# EAGLE board BBB_Breakout_Cape-Panel-v10 (EAGLE 7.7.0), part 1 of 3
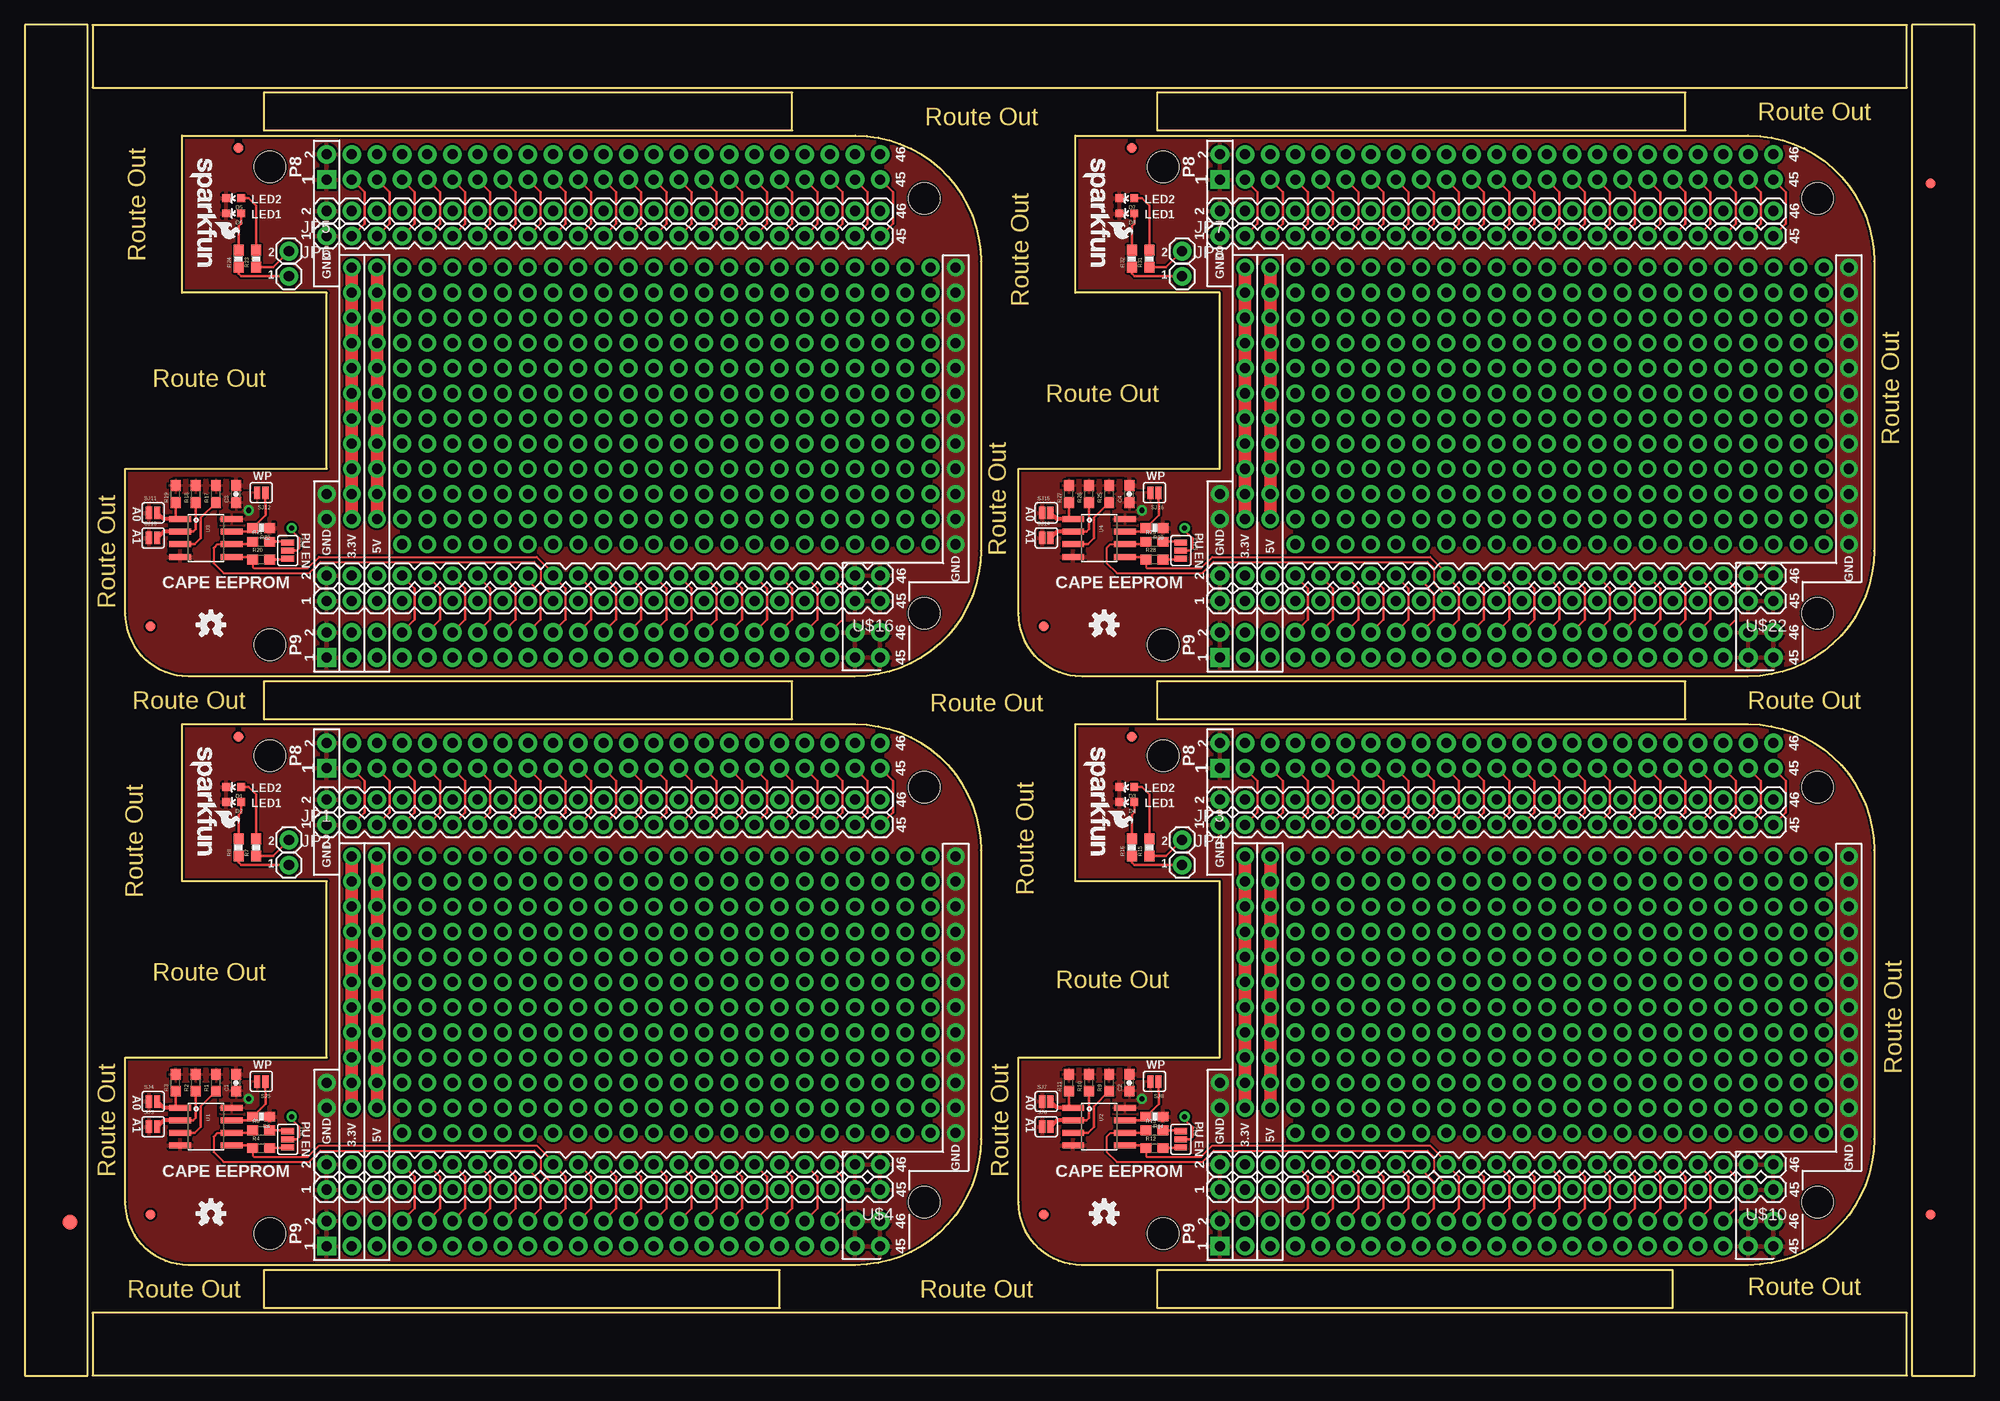
[diagram p0: board, top side]
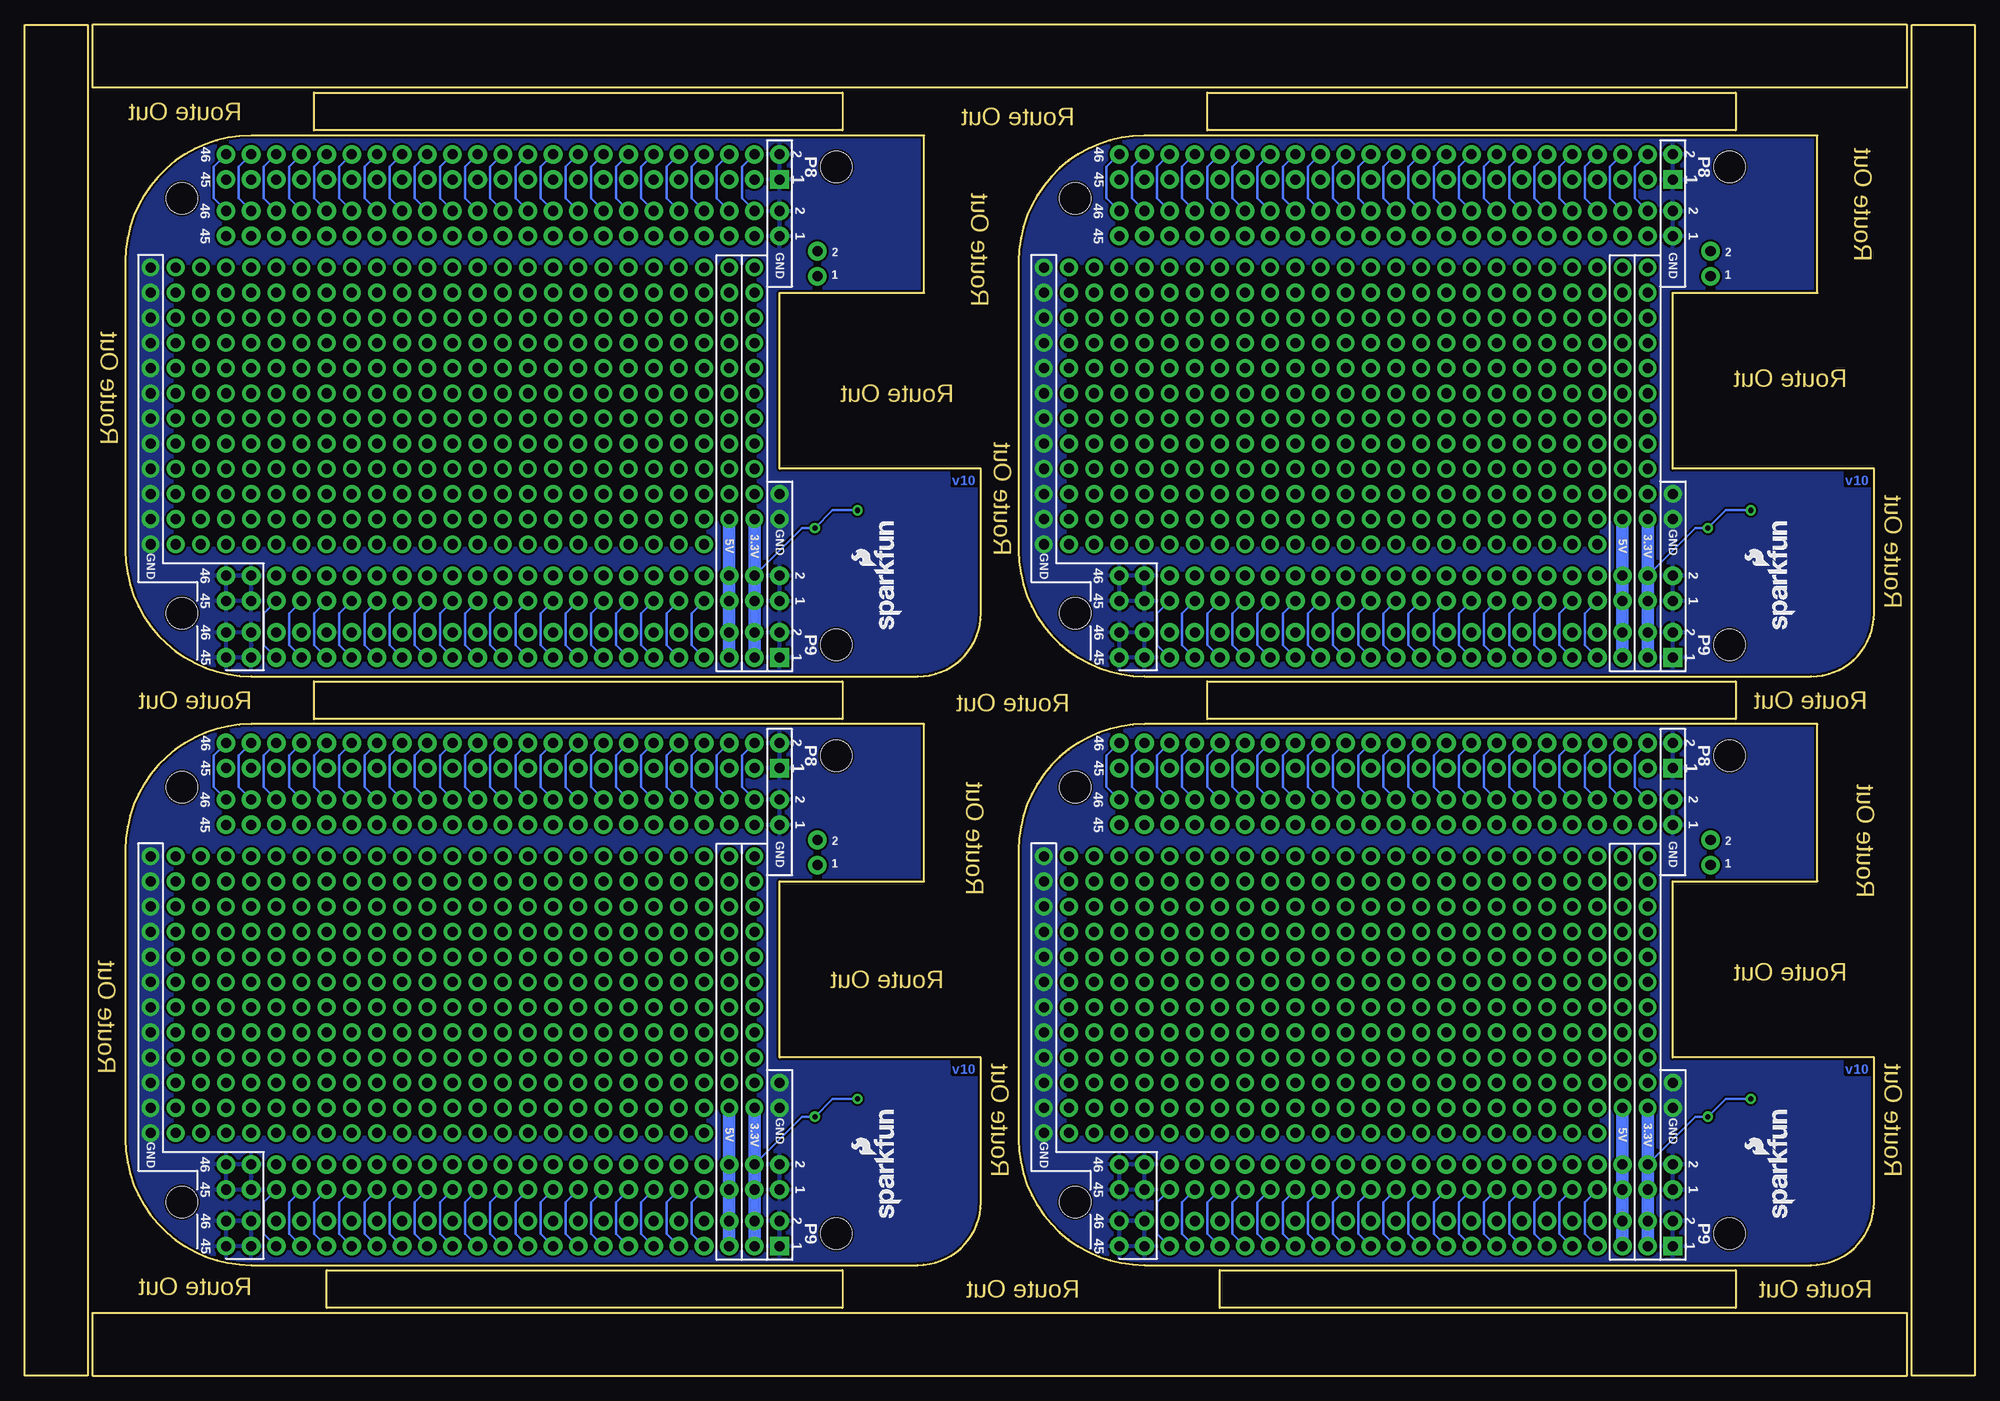
[diagram p1: board, bottom side, seen from below]

Size 196.85 x 136.4 mm. Coordinates in mm from the lower left corner, seen from the top.
Outline: 10.16,32.13 30.48,32.13 30.48,49.91 15.88,49.91 15.88,65.79 83.82,65.79 arc-90 96.52,53.09 96.52,23.88 arc-90 83.82,11.18 16.51,11.18 arc-90 10.16,17.53 10.16,32.13
Outline: 77.47,70.1 24.13,70.1 24.13,66.29 77.47,66.29 77.47,70.1
Outline: 76.2,10.67 24.13,10.67 24.13,6.86 76.2,6.86 76.2,10.67
Outline: 6.35,0 6.35,136.4 0,136.4 0,0 6.35,0
Outline: 6.86,6.35 6.86,0 189.99,0 189.99,6.35 6.86,6.35
Outline: 100.33,32.13 120.65,32.13 120.65,49.91 106.05,49.91 106.05,65.79 173.99,65.79 arc-90 186.69,53.09 186.69,23.88 arc-90 173.99,11.18 106.68,11.18 arc-90 100.33,17.53 100.33,32.13
Outline: 167.64,70.1 114.3,70.1 114.3,66.29 167.64,66.29 167.64,70.1
Outline: 10.16,91.57 30.48,91.57 30.48,109.35 15.88,109.35 15.88,125.22 83.82,125.22 arc-90 96.52,112.52 96.52,83.31 arc-90 83.82,70.61 16.51,70.61 arc-90 10.16,76.96 10.16,91.57
Outline: 77.47,129.54 24.13,129.54 24.13,125.73 77.47,125.73 77.47,129.54
Outline: 100.33,91.57 120.65,91.57 120.65,109.35 106.05,109.35 106.05,125.22 173.99,125.22 arc-90 186.69,112.52 186.69,83.31 arc-90 173.99,70.61 106.68,70.61 arc-90 100.33,76.96 100.33,91.57
Outline: 167.64,129.54 114.3,129.54 114.3,125.73 167.64,125.73 167.64,129.54
Outline: 196.85,0 196.85,136.4 190.5,136.4 190.5,0 196.85,0
Outline: 166.37,10.67 114.3,10.67 114.3,6.86 166.37,6.86 166.37,10.67
Outline: 189.99,130.05 189.99,136.4 6.86,136.4 6.86,130.05 189.99,130.05
Copper layers (1*16): Top 0.035mm / dielectric 1.5mm / Bottom 0.035mm
Design rules "SparkFun-2-layer": minimum track width 7mil, minimum drill 15mil, track to track 8mil, track to pad 8mil, pad to pad 8mil, via to via 8mil, smd to smd 8mil, copper to edge 8mil, drill to drill 8mil, minimum pad ring 12mil, minimum via ring 10mil, stop-mask expansion 4mil, vias tented up to drill 20mil, thermal gap 10mil

## Footprints (pad centres in the part's own frame; a part is rotated, then mirrored left to right if it is on the bottom)
0603-CAP = smd 1.1 x 1: 1 -0.85,0; 2 0.85,0
LED-0603 = smd 0.8 x 0.8: A 0,-0.75; C 0,0.75
FIDUCIAL-1.5X3 = smd 1.5 x 1.5: 1 0,0
FIDUCIAL-1X2 = smd 1 x 1: 1 0,0
1X01 = drill 1.016 pad 1.88: 1 0,0
0603 = smd 1.1 x 1: 1 -0.85,0; 2 0.85,0
0603-RES = smd 1.1 x 1: 1 -0.85,0; 2 0.85,0
SMT-JUMPER_3_2-NC_PASTE_SILK = smd 0.635 x 1.27: 1 -0.813,0; 2 0,0; 3 0.813,0
SMT-JUMPER_2_NO_SILK = smd 0.635 x 1.27: 1 -0.406,0; 2 0.406,0
SO08 = smd 0.61 x 2.21: 1 -1.905,-2.616; 2 -0.635,-2.616; 3 0.635,-2.616; 4 1.905,-2.616; 5 1.905,2.616; 6 0.635,2.616; 7 -0.635,2.616; 8 -1.905,2.616
BEAGLE_BONE_BLACK_CAPE = drill 1.016 pad 1.88 square: P8.1 20.32,50.165; P9.1 20.32,1.905 | drill 1.016 pad 1.88: P8.2 20.32,52.705; P8.3 22.86,50.165; P8.4 22.86,52.705; P8.5 25.4,50.165; P8.6 25.4,52.705; P8.7 27.94,50.165; P8.8 27.94,52.705; P8.9 30.48,50.165; P8.10 30.48,52.705; P8.11 33.02,50.165; P8.12 33.02,52.705; P8.13 35.56,50.165; P8.14 35.56,52.705; P8.15 38.1,50.165; P8.16 38.1,52.705; P8.17 40.64,50.165; P8.18 40.64,52.705; P8.19 43.18,50.165; P8.20 43.18,52.705; P8.21 45.72,50.165; P8.22 45.72,52.705; P8.23 48.26,50.165; P8.24 48.26,52.705; P8.25 50.8,50.165; P8.26 50.8,52.705; P8.27 53.34,50.165; P8.28 53.34,52.705; P8.29 55.88,50.165; P8.30 55.88,52.705; P8.31 58.42,50.165; P8.32 58.42,52.705; P8.33 60.96,50.165; P8.34 60.96,52.705; P8.35 63.5,50.165; P8.36 63.5,52.705; P8.37 66.04,50.165; P8.38 66.04,52.705; P8.39 68.58,50.165; P8.40 68.58,52.705; P8.41 71.12,50.165; P8.42 71.12,52.705; P8.43 73.66,50.165; P8.44 73.66,52.705; P8.45 76.2,50.165; P8.46 76.2,52.705; P9.2 20.32,4.445; P9.3 22.86,1.905; P9.4 22.86,4.445; P9.5 25.4,1.905; P9.6 25.4,4.445; P9.7 27.94,1.905; P9.8 27.94,4.445; P9.9 30.48,1.905; P9.10 30.48,4.445; P9.11 33.02,1.905; P9.12 33.02,4.445; P9.13 35.56,1.905; P9.14 35.56,4.445; P9.15 38.1,1.905; P9.16 38.1,4.445; P9.17 40.64,1.905; P9.18 40.64,4.445; P9.19 43.18,1.905; P9.20 43.18,4.445; P9.21 45.72,1.905; P9.22 45.72,4.445; P9.23 48.26,1.905; P9.24 48.26,4.445; P9.25 50.8,1.905; P9.26 50.8,4.445; P9.27 53.34,1.905; P9.28 53.34,4.445; P9.29 55.88,1.905; P9.30 55.88,4.445; P9.31 58.42,1.905; P9.32 58.42,4.445; P9.33 60.96,1.905; P9.34 60.96,4.445; P9.35 63.5,1.905; P9.36 63.5,4.445; P9.37 66.04,1.905; P9.38 66.04,4.445; P9.39 68.58,1.905; P9.40 68.58,4.445; P9.41 71.12,1.905; P9.42 71.12,4.445; P9.43 73.66,1.905; P9.44 73.66,4.445; P9.45 76.2,1.905; P9.46 76.2,4.445 | hole 3.175: 14.605,3.175; 80.645,6.35; 80.645,48.26; 14.605,51.435
1X23 = drill 1.016 pad 1.88: 2 -26.67,0; 3 -24.13,0; 4 -21.59,0; 5 -19.05,0; 6 -16.51,0; 7 -13.97,0; 8 -11.43,0; 9 -8.89,0; 10 -6.35,0; 11 -3.81,0; 12 -1.27,0; 13 1.27,0; 14 3.81,0; 15 6.35,0; 16 8.89,0; 17 11.43,0; 18 13.97,0; 19 16.51,0; 20 19.05,0; 21 21.59,0; 22 24.13,0; 23 26.67,0; 24 29.21,0

## Placement (x,y rotation side)
C1  0.1uF  [0603-CAP]  21.34,29.59 90 top
C2  0.1uF  [0603-CAP]  111.51,29.59 90 top
C3  0.1uF  [0603-CAP]  21.34,89.03 90 top
C4  0.1uF  [0603-CAP]  111.51,89.03 90 top
D1  RED  [LED-0603]  21.08,59.44 90 top
D2  RED  [LED-0603]  21.08,57.91 90 top
D3  RED  [LED-0603]  111.25,59.44 90 top
D4  RED  [LED-0603]  111.25,57.91 90 top
D5  RED  [LED-0603]  21.08,118.87 90 top
D6  RED  [LED-0603]  21.08,117.35 90 top
D7  RED  [LED-0603]  111.25,118.87 90 top
D8  RED  [LED-0603]  111.25,117.35 90 top
E$1  [FIDUCIAL-1.5X3]  4.57,15.49 0 top
E$3  [FIDUCIAL-1X2]  192.41,16.26 0 top
E$4  [FIDUCIAL-1X2]  192.41,120.4 180 top
FID1  FIDUCIAL1X2  [FIDUCIAL-1X2]  12.7,16.26 0 top
FID2  FIDUCIAL1X2  [FIDUCIAL-1X2]  21.59,64.52 0 top
FID3  FIDUCIAL1X2  [FIDUCIAL-1X2]  102.87,16.26 0 top
FID4  FIDUCIAL1X2  [FIDUCIAL-1X2]  111.76,64.52 0 top
FID5  FIDUCIAL1X2  [FIDUCIAL-1X2]  12.7,75.69 0 top
FID6  FIDUCIAL1X2  [FIDUCIAL-1X2]  21.59,123.95 0 top
FID7  FIDUCIAL1X2  [FIDUCIAL-1X2]  102.87,75.69 0 top
FID8  FIDUCIAL1X2  [FIDUCIAL-1X2]  111.76,123.95 0 top
JP1  M01PTH  [1X01]  26.67,54.1 0 top
JP2  M01PTH  [1X01]  26.67,51.56 0 top
JP3  M01PTH  [1X01]  116.84,54.1 0 top
JP4  M01PTH  [1X01]  116.84,51.56 0 top
JP5  M01PTH  [1X01]  26.67,113.54 0 top
JP6  M01PTH  [1X01]  26.67,111 0 top
JP7  M01PTH  [1X01]  116.84,113.54 0 top
JP8  M01PTH  [1X01]  116.84,111 0 top
LOGO1  SFE_LOGO_NAME_FLAME.1_INCH  [SFE_LOGO_NAME_FLAME_.1]  106.68,63.88 270 top
LOGO2  OSHW-LOGOS  [OSHW-LOGO-S]  18.8,16.38 0 top
LOGO3  SFE_LOGO_NAME_FLAME.1_INCH  [SFE_LOGO_NAME_FLAME_.1]  16.51,63.88 270 top
LOGO4  OSHW-LOGOS  [OSHW-LOGO-S]  108.97,16.38 0 top
LOGO5  SFE_LOGO_NAME_FLAME.1_INCH  [SFE_LOGO_NAME_FLAME_.1]  16.51,123.32 270 top
LOGO6  OSHW-LOGOS  [OSHW-LOGO-S]  18.8,75.82 0 top
LOGO7  SFE_LOGO_NAME_FLAME.1_INCH  [SFE_LOGO_NAME_FLAME_.1]  106.68,123.32 270 top
LOGO8  OSHW-LOGOS  [OSHW-LOGO-S]  108.97,75.82 0 top
R1  4.7k  [0603]  19.3,29.59 90 top
R2  4.7k  [0603]  17.27,29.59 90 top
R3  4.7k  [0603]  15.24,29.59 90 top
R4  4.7k  [0603]  23.88,22.99 0 top
R5  4.7k  [0603]  23.88,24.77 0 top
R6  10k  [0603-RES]  23.88,26.16 180 top
R7  1K  [0603-RES]  23.37,53.34 90 top
R8  1K  [0603-RES]  21.59,53.34 90 top
R9  4.7k  [0603]  109.47,29.59 90 top
R10  4.7k  [0603]  107.44,29.59 90 top
R11  4.7k  [0603]  105.41,29.59 90 top
R12  4.7k  [0603]  114.05,22.99 0 top
R13  4.7k  [0603]  114.05,24.77 0 top
R14  10k  [0603-RES]  114.05,26.16 180 top
R15  1K  [0603-RES]  113.54,53.34 90 top
R16  1K  [0603-RES]  111.76,53.34 90 top
R17  4.7k  [0603]  19.3,89.03 90 top
R18  4.7k  [0603]  17.27,89.03 90 top
R19  4.7k  [0603]  15.24,89.03 90 top
R20  4.7k  [0603]  23.88,82.42 0 top
R21  4.7k  [0603]  23.88,84.2 0 top
R22  10k  [0603-RES]  23.88,85.6 180 top
R23  1K  [0603-RES]  23.37,112.78 90 top
R24  1K  [0603-RES]  21.59,112.78 90 top
R25  4.7k  [0603]  109.47,89.03 90 top
R26  4.7k  [0603]  107.44,89.03 90 top
R27  4.7k  [0603]  105.41,89.03 90 top
R28  4.7k  [0603]  114.05,82.42 0 top
R29  4.7k  [0603]  114.05,84.2 0 top
R30  10k  [0603-RES]  114.05,85.6 180 top
R31  1K  [0603-RES]  113.54,112.78 90 top
R32  1K  [0603-RES]  111.76,112.78 90 top
SJ1  I2C EN  [SMT-JUMPER_3_2-NC_PASTE_SILK]  26.54,23.88 270 top
SJ2  I2C EN  [SMT-JUMPER_3_2-NC_PASTE_SILK]  116.71,23.88 270 top
SJ3  A1  [SMT-JUMPER_2_NO_SILK]  12.95,25.15 0 top
SJ4  A0  [SMT-JUMPER_2_NO_SILK]  12.95,27.69 0 top
SJ5  WP  [SMT-JUMPER_2_NO_SILK]  23.88,29.72 180 top
SJ6  A1  [SMT-JUMPER_2_NO_SILK]  103.12,25.15 0 top
SJ7  A0  [SMT-JUMPER_2_NO_SILK]  103.12,27.69 0 top
SJ8  WP  [SMT-JUMPER_2_NO_SILK]  114.05,29.72 180 top
SJ9  I2C EN  [SMT-JUMPER_3_2-NC_PASTE_SILK]  26.54,83.31 270 top
SJ10  A1  [SMT-JUMPER_2_NO_SILK]  12.95,84.58 0 top
SJ11  A0  [SMT-JUMPER_2_NO_SILK]  12.95,87.12 0 top
SJ12  WP  [SMT-JUMPER_2_NO_SILK]  23.88,89.15 180 top
SJ13  I2C EN  [SMT-JUMPER_3_2-NC_PASTE_SILK]  116.71,83.31 270 top
SJ14  A1  [SMT-JUMPER_2_NO_SILK]  103.12,84.58 0 top
SJ15  A0  [SMT-JUMPER_2_NO_SILK]  103.12,87.12 0 top
SJ16  WP  [SMT-JUMPER_2_NO_SILK]  114.05,89.15 180 top
U1  EEPROM-I2CSMD  [SO08]  18.29,25.15 270 top
U2  EEPROM-I2CSMD  [SO08]  108.46,25.15 270 top
U3  EEPROM-I2CSMD  [SO08]  18.29,84.58 270 top
U4  EEPROM-I2CSMD  [SO08]  108.46,84.58 270 top
U$1  BEAGLE_BONE_BLACK_CAPE  [BEAGLE_BONE_BLACK_CAPE]  10.16,11.18 0 top
U$2  M23  [1X23]  59.69,55.63 180 top
U$3  M23  [1X23]  59.69,58.17 180 top
U$4  M23  [1X23]  59.69,18.8 180 top
U$5  M23  [1X23]  59.69,21.34 180 top
U$6  [SFE_LOGO_NAME_FLAME_.1]  18.03,15.49 90 bottom
U$7  BEAGLE_BONE_BLACK_CAPE  [BEAGLE_BONE_BLACK_CAPE]  100.33,11.18 0 top
U$8  M23  [1X23]  149.86,55.63 180 top
U$9  M23  [1X23]  149.86,58.17 180 top
U$10  M23  [1X23]  149.86,18.8 180 top
U$11  M23  [1X23]  149.86,21.34 180 top
U$12  [SFE_LOGO_NAME_FLAME_.1]  108.2,15.49 90 bottom
U$13  BEAGLE_BONE_BLACK_CAPE  [BEAGLE_BONE_BLACK_CAPE]  10.16,70.61 0 top
U$14  M23  [1X23]  59.69,115.06 180 top
U$15  M23  [1X23]  59.69,117.6 180 top
U$16  M23  [1X23]  59.69,78.23 180 top
U$17  M23  [1X23]  59.69,80.77 180 top
U$18  [SFE_LOGO_NAME_FLAME_.1]  18.03,74.93 90 bottom
U$19  BEAGLE_BONE_BLACK_CAPE  [BEAGLE_BONE_BLACK_CAPE]  100.33,70.61 0 top
U$20  M23  [1X23]  149.86,115.06 180 top
U$21  M23  [1X23]  149.86,117.6 180 top
U$22  M23  [1X23]  149.86,78.23 180 top
U$23  M23  [1X23]  149.86,80.77 180 top
U$24  [SFE_LOGO_NAME_FLAME_.1]  108.2,74.93 90 bottom

## Library data of the parts
C1-C4 = SparkFun-Capacitors; PROD_ID: CAP-00810
D1-D8 = SparkFun-LED; PROD_ID: DIO-00819
E$1 = SparkFun-Retired
E$3 E$4 FID1-FID8 LOGO1-LOGO8 U$6 U$12 U$18 U$24 = SparkFun-Aesthetics
JP1-JP8 U$2-U$5 U$8-U$11 U$14-U$17 U$20-U$23 = SparkFun-Connectors
R1-R5 R9-R13 R17-R21 R25-R29 = SparkFun-Resistors; PROD_ID: RES-07857
R6 R14 R22 R30 = SparkFun-Resistors; PROD_ID: RES-00824
R7 R8 R15 R16 R23 R24 R31 R32 = SparkFun-Resistors; PROD_ID: RES-07856
SJ1-SJ16 = SparkFun-Jumpers
U1-U4 = SparkFun-DigitalIC
U$1 U$7 U$13 U$19 = SparkFun-Boards

## Nets
3.3V: C1.1 R1.2 R2.2 R3.2 SJ1.2 SJ5.2 U1.8 U$1.P9.3 U$1.P9.4 U$4.23 U$5.23
3.3V1: C2.1 R9.2 R10.2 R11.2 SJ2.2 SJ8.2 U2.8 U$7.P9.3 U$7.P9.4 U$10.23 U$11.23
3.3V2: C3.1 R17.2 R18.2 R19.2 SJ9.2 SJ12.2 U3.8 U$13.P9.3 U$13.P9.4 U$16.23 U$17.23
3.3V3: C4.1 R25.2 R26.2 R27.2 SJ13.2 SJ16.2 U4.8 U$19.P9.3 U$19.P9.4 U$22.23 U$23.23
5V: U$1.P9.5 U$1.P9.6 U$4.22 U$5.22
5V1: U$7.P9.5 U$7.P9.6 U$10.22 U$11.22
5V2: U$13.P9.5 U$13.P9.6 U$16.22 U$17.22
5V3: U$19.P9.5 U$19.P9.6 U$22.22 U$23.22
A0: R3.1 SJ4.2 U1.1
A1: R2.1 SJ3.2 U1.2
A2: R10.1 SJ6.2 U2.2
A3: R11.1 SJ7.2 U2.1
A4: R18.1 SJ10.2 U3.2
A5: R19.1 SJ11.2 U3.1
A6: R26.1 SJ14.2 U4.2
A7: R27.1 SJ15.2 U4.1
GND: C1.2 D1.C D2.C R6.1 SJ3.1 SJ4.1 U1.4 U$1.P8.1 U$1.P8.2 U$1.P9.1 U$1.P9.2 U$1.P9.43 U$1.P9.44 U$1.P9.45 U$1.P9.46 U$2.24 U$3.24 U$4.2 U$4.3 U$4.24 U$5.2 U$5.3 U$5.24
GND1: C2.2 D3.C D4.C R14.1 SJ6.1 SJ7.1 U2.4 U$7.P8.1 U$7.P8.2 U$7.P9.1 U$7.P9.2 U$7.P9.43 U$7.P9.44 U$7.P9.45 U$7.P9.46 U$8.24 U$9.24 U$10.2 U$10.3 U$10.24 U$11.2 U$11.3 U$11.24
GND2: C3.2 D5.C D6.C R22.1 SJ10.1 SJ11.1 U3.4 U$13.P8.1 U$13.P8.2 U$13.P9.1 U$13.P9.2 U$13.P9.43 U$13.P9.44 U$13.P9.45 U$13.P9.46 U$14.24 U$15.24 U$16.2 U$16.3 U$16.24 U$17.2 U$17.3 U$17.24
GND3: C4.2 D7.C D8.C R30.1 SJ14.1 SJ15.1 U4.4 U$19.P8.1 U$19.P8.2 U$19.P9.1 U$19.P9.2 U$19.P9.43 U$19.P9.44 U$19.P9.45 U$19.P9.46 U$20.24 U$21.24 U$22.2 U$22.3 U$22.24 U$23.2 U$23.3 U$23.24
N$1: R6.2 SJ5.1 U1.7
N$2: U$1.P8.45 U$2.2
N$3: D1.A R7.2
N$4: U$1.P8.43 U$2.3
N$5: U$1.P8.41 U$2.4
N$6: R1.1 U1.3
N$7: D2.A R8.2
N$8: JP1.1 R7.1
N$9: U$1.P8.39 U$2.5
N$10: R4.2 SJ1.3
N$11: R5.2 SJ1.1
N$12: U$1.P8.37 U$2.6
N$13: U$1.P8.35 U$2.7
N$14: U$1.P8.33 U$2.8
N$15: U$1.P8.31 U$2.9
N$16: U$1.P8.29 U$2.10
N$17: U$1.P8.27 U$2.11
N$18: U$1.P8.25 U$2.12
N$19: U$1.P8.23 U$2.13
N$20: U$1.P8.21 U$2.14
N$21: U$1.P8.19 U$2.15
N$22: U$1.P8.17 U$2.16
N$23: U$1.P8.15 U$2.17
N$24: U$1.P8.13 U$2.18
N$25: U$1.P8.11 U$2.19
N$26: U$1.P8.9 U$2.20
N$27: U$1.P8.7 U$2.21
N$28: U$1.P8.5 U$2.22
N$29: U$1.P8.3 U$2.23
N$30: JP2.1 R8.1
N$31: U$1.P8.46 U$3.2
N$32: U$1.P8.44 U$3.3
N$33: U$1.P8.42 U$3.4
N$34: U$1.P8.40 U$3.5
N$35: U$1.P8.38 U$3.6
N$36: U$1.P8.36 U$3.7
N$37: U$1.P8.34 U$3.8
N$38: U$1.P8.32 U$3.9
N$39: U$1.P8.30 U$3.10
N$40: U$1.P8.28 U$3.11
N$41: U$1.P8.26 U$3.12
N$42: U$1.P8.24 U$3.13
N$43: U$1.P8.22 U$3.14
N$44: U$1.P8.20 U$3.15
N$45: U$1.P8.18 U$3.16
N$46: U$1.P8.16 U$3.17
N$47: U$1.P8.14 U$3.18
N$48: U$1.P8.12 U$3.19
N$49: U$1.P8.10 U$3.20
N$50: U$1.P8.8 U$3.21
N$51: U$1.P8.6 U$3.22
N$52: U$1.P8.4 U$3.23
N$53: R9.1 U2.3
N$54: R12.2 SJ2.3
N$55: R13.2 SJ2.1
N$56: U$1.P9.42 U$5.4
N$57: U$1.P9.40 U$5.5
N$58: U$1.P9.38 U$5.6
N$59: U$1.P9.36 U$5.7
N$60: U$1.P9.34 U$5.8
N$61: U$1.P9.32 U$5.9
N$62: U$1.P9.30 U$5.10
N$63: U$1.P9.28 U$5.11
N$64: U$1.P9.26 U$5.12
N$65: U$1.P9.24 U$5.13
N$66: U$1.P9.22 U$5.14
N$67: U$7.P8.45 U$8.2
N$68: U$1.P9.18 U$5.16
N$69: U$1.P9.16 U$5.17
N$70: U$1.P9.14 U$5.18
N$71: U$1.P9.12 U$5.19
N$72: U$1.P9.10 U$5.20
N$73: U$1.P9.8 U$5.21
N$74: U$7.P8.43 U$8.3
N$75: U$7.P8.41 U$8.4
N$76: U$7.P8.39 U$8.5
N$77: U$7.P8.37 U$8.6
N$78: U$7.P8.35 U$8.7
N$79: U$1.P9.41 U$4.4
N$80: U$1.P9.39 U$4.5
N$81: U$1.P9.37 U$4.6
N$82: U$1.P9.35 U$4.7
N$83: U$1.P9.33 U$4.8
N$84: U$1.P9.31 U$4.9
N$85: U$1.P9.29 U$4.10
N$86: U$1.P9.27 U$4.11
N$87: U$1.P9.25 U$4.12
N$88: U$1.P9.23 U$4.13
N$89: U$1.P9.21 U$4.14
N$90: U$7.P8.33 U$8.8
N$91: U$1.P9.17 U$4.16
N$92: U$1.P9.15 U$4.17
N$93: U$1.P9.13 U$4.18
N$94: U$1.P9.11 U$4.19
N$95: U$1.P9.9 U$4.20
N$96: U$1.P9.7 U$4.21
N$97: U$7.P8.31 U$8.9
N$98: U$7.P8.29 U$8.10
N$99: U$7.P8.27 U$8.11
N$340: U$7.P8.25 U$8.12
N$341: U$7.P8.23 U$8.13
N$342: U$7.P8.21 U$8.14
N$343: U$7.P8.19 U$8.15
N$344: U$7.P8.17 U$8.16
N$345: U$7.P8.15 U$8.17
N$346: U$7.P8.13 U$8.18
N$347: U$7.P8.11 U$8.19
N$348: U$7.P8.9 U$8.20
N$349: U$7.P8.7 U$8.21
N$350: U$7.P8.5 U$8.22
N$351: U$7.P8.3 U$8.23
N$352: U$7.P8.46 U$9.2
N$353: U$7.P8.44 U$9.3
N$354: U$7.P8.42 U$9.4
N$355: U$7.P8.40 U$9.5
N$356: U$7.P8.38 U$9.6
N$357: U$7.P8.36 U$9.7
N$358: U$7.P8.34 U$9.8
N$359: U$7.P8.32 U$9.9
N$360: U$7.P8.30 U$9.10
N$361: U$7.P8.28 U$9.11
N$362: U$7.P8.26 U$9.12
N$363: U$7.P8.24 U$9.13
N$387: U$7.P8.22 U$9.14
N$388: U$7.P8.20 U$9.15
N$389: U$7.P8.18 U$9.16
N$390: U$7.P8.16 U$9.17
N$392: U$7.P8.14 U$9.18
N$393: U$7.P8.12 U$9.19
N$394: U$7.P8.10 U$9.20
N$395: U$7.P8.8 U$9.21
N$396: U$7.P8.6 U$9.22
N$397: U$7.P8.4 U$9.23
N$398: U$7.P9.42 U$11.4
N$399: U$7.P9.40 U$11.5
N$400: U$7.P9.38 U$11.6
N$401: U$7.P9.36 U$11.7
N$402: U$7.P9.34 U$11.8
N$403: U$7.P9.32 U$11.9
N$404: U$7.P9.30 U$11.10
N$405: U$7.P9.28 U$11.11
N$406: U$7.P9.26 U$11.12
N$407: U$7.P9.24 U$11.13
N$408: U$7.P9.22 U$11.14
N$409: U$7.P9.18 U$11.16
N$410: U$7.P9.16 U$11.17
N$411: U$7.P9.14 U$11.18
N$412: U$7.P9.12 U$11.19
N$413: U$7.P9.10 U$11.20
N$414: U$7.P9.8 U$11.21
N$415: U$7.P9.41 U$10.4
N$416: U$7.P9.39 U$10.5
N$417: U$7.P9.37 U$10.6
N$418: U$7.P9.35 U$10.7
N$419: U$7.P9.33 U$10.8
N$420: U$7.P9.31 U$10.9
N$421: U$7.P9.29 U$10.10
N$422: U$7.P9.27 U$10.11
N$423: U$7.P9.25 U$10.12
N$424: U$7.P9.23 U$10.13
N$425: U$7.P9.21 U$10.14
N$426: U$7.P9.17 U$10.16
N$427: U$7.P9.15 U$10.17
N$428: U$7.P9.13 U$10.18
N$429: U$7.P9.11 U$10.19
N$430: U$7.P9.9 U$10.20
N$431: U$7.P9.7 U$10.21
N$696: R14.2 SJ8.1 U2.7
N$697: D3.A R15.2
N$698: D4.A R16.2
N$699: JP3.1 R15.1
N$700: JP4.1 R16.1
N$701: R17.1 U3.3
N$702: R20.2 SJ9.3
N$703: R21.2 SJ9.1
N$704: U$13.P8.45 U$14.2
N$705: U$13.P8.43 U$14.3
N$706: U$13.P8.41 U$14.4
N$707: U$13.P8.39 U$14.5
N$708: U$13.P8.37 U$14.6
N$709: U$13.P8.35 U$14.7
N$710: U$13.P8.33 U$14.8
N$711: U$13.P8.31 U$14.9
N$712: U$13.P8.29 U$14.10
N$713: U$13.P8.27 U$14.11
N$714: U$13.P8.25 U$14.12
N$715: U$13.P8.23 U$14.13
N$716: U$13.P8.21 U$14.14
N$717: U$13.P8.19 U$14.15
N$718: U$13.P8.17 U$14.16
N$719: U$13.P8.15 U$14.17
N$720: U$13.P8.13 U$14.18
N$721: U$13.P8.11 U$14.19
N$722: U$13.P8.9 U$14.20
N$723: U$13.P8.7 U$14.21
N$724: U$13.P8.5 U$14.22
N$725: U$13.P8.3 U$14.23
N$726: U$13.P8.46 U$15.2
N$727: U$13.P8.44 U$15.3
N$728: U$13.P8.42 U$15.4
N$729: U$13.P8.40 U$15.5
N$730: U$13.P8.38 U$15.6
N$731: U$13.P8.36 U$15.7
N$732: U$13.P8.34 U$15.8
N$733: U$13.P8.32 U$15.9
N$734: U$13.P8.30 U$15.10
N$735: U$13.P8.28 U$15.11
N$736: U$13.P8.26 U$15.12
N$737: U$13.P8.24 U$15.13
N$738: U$13.P8.22 U$15.14
N$739: U$13.P8.20 U$15.15
N$740: U$13.P8.18 U$15.16
N$741: U$13.P8.16 U$15.17
N$742: U$13.P8.14 U$15.18
N$743: U$13.P8.12 U$15.19
N$744: U$13.P8.10 U$15.20
N$745: U$13.P8.8 U$15.21
N$746: U$13.P8.6 U$15.22
N$747: U$13.P8.4 U$15.23
N$748: U$13.P9.42 U$17.4
N$749: U$13.P9.40 U$17.5
N$750: U$13.P9.38 U$17.6
N$751: U$13.P9.36 U$17.7
N$752: U$13.P9.34 U$17.8
N$753: U$13.P9.32 U$17.9
N$754: U$13.P9.30 U$17.10
N$755: U$13.P9.28 U$17.11
N$756: U$13.P9.26 U$17.12
N$757: U$13.P9.24 U$17.13
N$758: U$13.P9.22 U$17.14
N$759: U$13.P9.18 U$17.16
N$760: U$13.P9.16 U$17.17
N$761: U$13.P9.14 U$17.18
N$762: U$13.P9.12 U$17.19
N$763: U$13.P9.10 U$17.20
N$764: U$13.P9.8 U$17.21
N$765: U$13.P9.41 U$16.4
N$766: U$13.P9.39 U$16.5
N$767: U$13.P9.37 U$16.6
N$768: U$13.P9.35 U$16.7
N$769: U$13.P9.33 U$16.8
N$770: U$13.P9.31 U$16.9
N$771: U$13.P9.29 U$16.10
N$772: U$13.P9.27 U$16.11
N$773: U$13.P9.25 U$16.12
N$774: U$13.P9.23 U$16.13
N$775: U$13.P9.21 U$16.14
N$776: U$13.P9.17 U$16.16
N$777: U$13.P9.15 U$16.17
N$778: U$13.P9.13 U$16.18
N$779: U$13.P9.11 U$16.19
N$780: U$13.P9.9 U$16.20
N$781: U$13.P9.7 U$16.21
N$1046: R22.2 SJ12.1 U3.7
N$1047: D5.A R23.2
N$1048: D6.A R24.2
N$1049: JP5.1 R23.1
N$1050: JP6.1 R24.1
N$1051: R25.1 U4.3
N$1052: R28.2 SJ13.3
N$1053: R29.2 SJ13.1
N$1054: U$19.P8.45 U$20.2
N$1055: U$19.P8.43 U$20.3
N$1056: U$19.P8.41 U$20.4
N$1057: U$19.P8.39 U$20.5
N$1058: U$19.P8.37 U$20.6
N$1059: U$19.P8.35 U$20.7
N$1060: U$19.P8.33 U$20.8
N$1061: U$19.P8.31 U$20.9
N$1062: U$19.P8.29 U$20.10
N$1063: U$19.P8.27 U$20.11
N$1064: U$19.P8.25 U$20.12
N$1065: U$19.P8.23 U$20.13
N$1066: U$19.P8.21 U$20.14
N$1067: U$19.P8.19 U$20.15
N$1068: U$19.P8.17 U$20.16
N$1069: U$19.P8.15 U$20.17
N$1070: U$19.P8.13 U$20.18
N$1071: U$19.P8.11 U$20.19
N$1072: U$19.P8.9 U$20.20
N$1073: U$19.P8.7 U$20.21
N$1074: U$19.P8.5 U$20.22
N$1075: U$19.P8.3 U$20.23
N$1076: U$19.P8.46 U$21.2
N$1077: U$19.P8.44 U$21.3
N$1078: U$19.P8.42 U$21.4
N$1079: U$19.P8.40 U$21.5
N$1080: U$19.P8.38 U$21.6
N$1081: U$19.P8.36 U$21.7
N$1082: U$19.P8.34 U$21.8
N$1083: U$19.P8.32 U$21.9
N$1084: U$19.P8.30 U$21.10
N$1085: U$19.P8.28 U$21.11
N$1086: U$19.P8.26 U$21.12
N$1087: U$19.P8.24 U$21.13
N$1088: U$19.P8.22 U$21.14
N$1089: U$19.P8.20 U$21.15
N$1090: U$19.P8.18 U$21.16
N$1091: U$19.P8.16 U$21.17
N$1092: U$19.P8.14 U$21.18
N$1093: U$19.P8.12 U$21.19
N$1094: U$19.P8.10 U$21.20
N$1095: U$19.P8.8 U$21.21
N$1096: U$19.P8.6 U$21.22
N$1097: U$19.P8.4 U$21.23
N$1098: U$19.P9.42 U$23.4
N$1099: U$19.P9.40 U$23.5
N$1100: U$19.P9.38 U$23.6
N$1101: U$19.P9.36 U$23.7
N$1102: U$19.P9.34 U$23.8
N$1103: U$19.P9.32 U$23.9
N$1104: U$19.P9.30 U$23.10
N$1105: U$19.P9.28 U$23.11
N$1106: U$19.P9.26 U$23.12
N$1107: U$19.P9.24 U$23.13
N$1108: U$19.P9.22 U$23.14
N$1109: U$19.P9.18 U$23.16
N$1110: U$19.P9.16 U$23.17
N$1111: U$19.P9.14 U$23.18
N$1112: U$19.P9.12 U$23.19
N$1113: U$19.P9.10 U$23.20
N$1114: U$19.P9.8 U$23.21
N$1115: U$19.P9.41 U$22.4
N$1116: U$19.P9.39 U$22.5
N$1117: U$19.P9.37 U$22.6
N$1118: U$19.P9.35 U$22.7
N$1119: U$19.P9.33 U$22.8
N$1120: U$19.P9.31 U$22.9
N$1121: U$19.P9.29 U$22.10
N$1122: U$19.P9.27 U$22.11
N$1123: U$19.P9.25 U$22.12
N$1124: U$19.P9.23 U$22.13
N$1125: U$19.P9.21 U$22.14
N$1126: U$19.P9.17 U$22.16
N$1127: U$19.P9.15 U$22.17
N$1128: U$19.P9.13 U$22.18
N$1129: U$19.P9.11 U$22.19
N$1130: U$19.P9.9 U$22.20
N$1131: U$19.P9.7 U$22.21
N$1396: R30.2 SJ16.1 U4.7
N$1397: D7.A R31.2
N$1398: D8.A R32.2
N$1399: JP7.1 R31.1
N$1400: JP8.1 R32.1
SCL: R5.1 U1.6 U$1.P9.19 U$4.15
SCL1: R13.1 U2.6 U$7.P9.19 U$10.15
SCL2: R21.1 U3.6 U$13.P9.19 U$16.15
SCL3: R29.1 U4.6 U$19.P9.19 U$22.15
SDA: R4.1 U1.5 U$1.P9.20 U$5.15
SDA1: R12.1 U2.5 U$7.P9.20 U$11.15
SDA2: R20.1 U3.5 U$13.P9.20 U$17.15
SDA3: R28.1 U4.5 U$19.P9.20 U$23.15

## Tracks (layer width: path | path; a pad name or v marks a point on that pad's centre or on a via)
3.3V  (via drill 0.51, 1.02 pad 1.78)
  Top 0.254: R1.2 19.64,30.31 | SJ1.2 27.43,23.88 27.69,24.13 27.69,25.15 26.92,25.91 v26.92,26.16
  Top 1.27: v33.02,27.05 v33.02,29.59 v33.02,32.13 v33.02,34.67 v33.02,37.21 v33.02,39.75 v33.02,42.29 v33.02,44.83 v33.02,47.37 v33.02,49.91 v33.02,52.45
  Bottom 0.254: U$5.23 28.19,26.16 v26.92,26.16 25.15,27.94 v22.61,27.94
  Bottom 1.27: U$1.P9.3 U$1.P9.4 U$4.23 U$5.23 v33.02,27.05
  pour Top: 19.68,26.42 23.62,26.42 23.62,29.72 20.57,29.72 20.57,30.99 14.61,30.99 14.61,29.72 19.68,29.72
3.3V1  (via drill 0.51, 1.02 pad 1.78)
  Top 0.254: R9.2 109.81,30.31 | SJ2.2 117.6,23.88 117.86,24.13 117.86,25.15 117.09,25.91 v117.09,26.16
  Top 1.27: v123.19,27.05 v123.19,29.59 v123.19,32.13 v123.19,34.67 v123.19,37.21 v123.19,39.75 v123.19,42.29 v123.19,44.83 v123.19,47.37 v123.19,49.91 v123.19,52.45
  Bottom 0.254: U$11.23 118.36,26.16 v117.09,26.16 115.32,27.94 v112.78,27.94
  Bottom 1.27: U$7.P9.3 U$7.P9.4 U$10.23 U$11.23 v123.19,27.05
  pour Top: 109.86,26.42 113.79,26.42 113.79,29.72 110.74,29.72 110.74,30.99 104.78,30.99 104.78,29.72 109.86,29.72
3.3V2  (via drill 0.51, 1.02 pad 1.78)
  Top 0.254: R17.2 19.64,89.75 | SJ9.2 27.43,83.31 27.69,83.57 27.69,84.58 26.92,85.34 v26.92,85.6
  Top 1.27: v33.02,86.49 v33.02,89.03 v33.02,91.57 v33.02,94.11 v33.02,96.65 v33.02,99.19 v33.02,101.73 v33.02,104.27 v33.02,106.81 v33.02,109.35 v33.02,111.89
  Bottom 0.254: U$17.23 28.19,85.6 v26.92,85.6 25.15,87.38 v22.61,87.38
  Bottom 1.27: U$13.P9.3 U$13.P9.4 U$16.23 U$17.23 v33.02,86.49
  pour Top: 19.68,85.85 23.62,85.85 23.62,89.15 20.57,89.15 20.57,90.42 14.61,90.42 14.61,89.15 19.68,89.15
3.3V3  (via drill 0.51, 1.02 pad 1.78)
  Top 0.254: R25.2 109.81,89.75 | SJ13.2 117.6,83.31 117.86,83.57 117.86,84.58 117.09,85.34 v117.09,85.6
  Top 1.27: v123.19,86.49 v123.19,89.03 v123.19,91.57 v123.19,94.11 v123.19,96.65 v123.19,99.19 v123.19,101.73 v123.19,104.27 v123.19,106.81 v123.19,109.35 v123.19,111.89
  Bottom 0.254: U$23.23 118.36,85.6 v117.09,85.6 115.32,87.38 v112.78,87.38
  Bottom 1.27: U$19.P9.3 U$19.P9.4 U$22.23 U$23.23 v123.19,86.49
  pour Top: 109.86,85.85 113.79,85.85 113.79,89.15 110.74,89.15 110.74,90.42 104.78,90.42 104.78,89.15 109.86,89.15
5V  (via drill 1.02 pad 1.78)
  Top 1.27: v35.56,52.45 v35.56,49.91 v35.56,47.37 v35.56,44.83 v35.56,42.29 v35.56,39.75 v35.56,37.21 v35.56,34.67 v35.56,32.13 v35.56,29.59 v35.56,27.05
  Bottom 1.27: U$1.P9.5 U$1.P9.6 U$4.22 U$5.22 v35.56,27.05
5V1  (via drill 1.02 pad 1.78)
  Top 1.27: v125.73,52.45 v125.73,49.91 v125.73,47.37 v125.73,44.83 v125.73,42.29 v125.73,39.75 v125.73,37.21 v125.73,34.67 v125.73,32.13 v125.73,29.59 v125.73,27.05
  Bottom 1.27: U$7.P9.5 U$7.P9.6 U$10.22 U$11.22 v125.73,27.05
5V2  (via drill 1.02 pad 1.78)
  Top 1.27: v35.56,111.89 v35.56,109.35 v35.56,106.81 v35.56,104.27 v35.56,101.73 v35.56,99.19 v35.56,96.65 v35.56,94.11 v35.56,91.57 v35.56,89.03 v35.56,86.49
  Bottom 1.27: U$13.P9.5 U$13.P9.6 U$16.22 U$17.22 v35.56,86.49
5V3  (via drill 1.02 pad 1.78)
  Top 1.27: v125.73,111.89 v125.73,109.35 v125.73,106.81 v125.73,104.27 v125.73,101.73 v125.73,99.19 v125.73,96.65 v125.73,94.11 v125.73,91.57 v125.73,89.03 v125.73,86.49
  Bottom 1.27: U$19.P9.5 U$19.P9.6 U$22.22 U$23.22 v125.73,86.49
A0
  Top 0.254: R3.1 15.24,27.05 U1.1
  Top 0.406: 15.24,27.05 14.04,27.05 SJ4.2
A1
  Top 0.254: R2.1 17.27,26.04 17.02,25.78 U1.2
  Top 0.406: U1.2 14.04,25.78 SJ3.2
A2
  Top 0.254: R10.1 107.44,26.04 107.19,25.78 U2.2
  Top 0.406: U2.2 104.21,25.78 SJ6.2
A3
  Top 0.254: R11.1 105.41,27.05 U2.1
  Top 0.406: 105.41,27.05 104.21,27.05 SJ7.2
A4
  Top 0.254: R18.1 17.27,85.47 17.02,85.22 U3.2
  Top 0.406: U3.2 14.04,85.22 SJ10.2
A5
  Top 0.254: R19.1 15.24,86.49 U3.1
  Top 0.406: 15.24,86.49 14.04,86.49 SJ11.2
A6
  Top 0.254: R26.1 107.44,85.47 107.19,85.22 U4.2
  Top 0.406: U4.2 104.21,85.22 SJ14.2
A7
  Top 0.254: R27.1 105.41,86.49 U4.1
  Top 0.406: 105.41,86.49 104.21,86.49 SJ15.2
GND  (via drill 1.02 pad 1.78)
  other vias: 93.98,24.51 93.98,27.05 93.98,29.59 93.98,32.13 93.98,34.67 93.98,37.21 93.98,39.75 93.98,42.29 93.98,44.83 93.98,47.37 93.98,49.91 93.98,52.45 30.48,27.05 30.48,29.59
  pour Top (rank 6): 10.16,32.13 30.48,32.13 30.48,49.91 15.88,49.91 15.88,65.79 83.82,65.79 arc-90 96.52,53.09 96.52,23.88 arc-90 83.82,11.18 16.51,11.18 arc-90 10.16,17.53
  pour Bottom: 10.16,32.13 30.48,32.13 30.48,49.91 15.88,49.91 15.88,65.79 83.82,65.79 arc-90 96.52,53.09 96.52,23.88 arc-90 83.82,11.18 16.51,11.18 arc-90 10.16,17.53
GND1  (via drill 1.02 pad 1.78)
  other vias: 184.15,24.51 184.15,27.05 184.15,29.59 184.15,32.13 184.15,34.67 184.15,37.21 184.15,39.75 184.15,42.29 184.15,44.83 184.15,47.37 184.15,49.91 184.15,52.45 120.65,27.05 120.65,29.59
  pour Top (rank 6): 100.33,32.13 120.65,32.13 120.65,49.91 106.05,49.91 106.05,65.79 173.99,65.79 arc-90 186.69,53.09 186.69,23.88 arc-90 173.99,11.18 106.68,11.18 arc-90 100.33,17.53
  pour Bottom: 100.33,32.13 120.65,32.13 120.65,49.91 106.05,49.91 106.05,65.79 173.99,65.79 arc-90 186.69,53.09 186.69,23.88 arc-90 173.99,11.18 106.68,11.18 arc-90 100.33,17.53
GND2  (via drill 1.02 pad 1.78)
  other vias: 93.98,83.95 93.98,86.49 93.98,89.03 93.98,91.57 93.98,94.11 93.98,96.65 93.98,99.19 93.98,101.73 93.98,104.27 93.98,106.81 93.98,109.35 93.98,111.89 30.48,86.49 30.48,89.03
  pour Top (rank 6): 10.16,91.57 30.48,91.57 30.48,109.35 15.88,109.35 15.88,125.22 83.82,125.22 arc-90 96.52,112.52 96.52,83.31 arc-90 83.82,70.61 16.51,70.61 arc-90 10.16,76.96
  pour Bottom: 10.16,91.57 30.48,91.57 30.48,109.35 15.88,109.35 15.88,125.22 83.82,125.22 arc-90 96.52,112.52 96.52,83.31 arc-90 83.82,70.61 16.51,70.61 arc-90 10.16,76.96
GND3  (via drill 1.02 pad 1.78)
  other vias: 184.15,83.95 184.15,86.49 184.15,89.03 184.15,91.57 184.15,94.11 184.15,96.65 184.15,99.19 184.15,101.73 184.15,104.27 184.15,106.81 184.15,109.35 184.15,111.89 120.65,86.49 120.65,89.03
  pour Top (rank 6): 100.33,91.57 120.65,91.57 120.65,109.35 106.05,109.35 106.05,125.22 173.99,125.22 arc-90 186.69,112.52 186.69,83.31 arc-90 173.99,70.61 106.68,70.61 arc-90 100.33,76.96
  pour Bottom: 100.33,91.57 120.65,91.57 120.65,109.35 106.05,109.35 106.05,125.22 173.99,125.22 arc-90 186.69,112.52 186.69,83.31 arc-90 173.99,70.61 106.68,70.61 arc-90 100.33,76.96
N$1
  Top 0.254: SJ5.1 24.33,27.46 R6.2 22.64,25.78 U1.7
N$2
  Top 0.254: U$1.P8.45 87.63,60.07 87.63,56.9 U$2.2
N$3
  Top 0.254: R7.2 23.37,58.67 22.61,59.44 D1.A
N$4
  Top 0.254: U$1.P8.43 85.09,60.07 85.09,56.9 U$2.3
N$5
  Top 0.254: U$1.P8.41 82.55,60.07 82.55,56.9 U$2.4
N$6
  Top 0.254: U1.3 17.14,24.51 17.78,25.15 17.78,27.22 R1.1
N$7
  Top 0.254: R8.2 21.59,56.64 21.84,56.9 21.84,57.9 D2.A
N$8
  Top 0.254: R7.1 25.06,52.49 JP1.1
N$9
  Top 0.254: U$1.P8.39 80.01,60.07 80.01,56.9 U$2.5
N$10
  Top 0.254: R4.2 26.47,22.99 SJ1.3
N$11
  Top 0.254: R5.2 26.42,24.77 26.54,24.64 SJ1.1
N$12
  Top 0.254: U$1.P8.37 77.47,60.07 77.47,56.9 U$2.6
N$13
  Top 0.254: U$1.P8.35 74.93,60.07 74.93,56.9 U$2.7
N$14
  Top 0.254: U$1.P8.33 72.39,60.07 72.39,56.9 U$2.8
N$15
  Top 0.254: U$1.P8.31 69.85,60.07 69.85,56.9 U$2.9
N$16
  Top 0.254: U$1.P8.29 67.31,60.07 67.31,56.9 U$2.10
N$17
  Top 0.254: U$1.P8.27 64.77,60.07 64.77,56.9 U$2.11
N$18
  Top 0.254: U$1.P8.25 62.23,60.07 62.23,56.9 U$2.12
N$19
  Top 0.254: U$1.P8.23 59.69,60.07 59.69,56.9 U$2.13
N$20
  Top 0.254: U$1.P8.21 57.15,60.07 57.15,56.9 U$2.14
N$21
  Top 0.254: U$1.P8.19 54.61,60.07 54.61,56.9 U$2.15
N$22
  Top 0.254: U$1.P8.17 52.07,60.07 52.07,56.9 U$2.16
N$23
  Top 0.254: U$1.P8.15 49.53,60.07 49.53,56.9 U$2.17
N$24
  Top 0.254: U$1.P8.13 46.99,60.07 46.99,56.9 U$2.18
N$25
  Top 0.254: U$1.P8.11 44.45,60.07 44.45,56.9 U$2.19
N$26
  Top 0.254: U$1.P8.9 41.91,60.07 41.91,56.9 U$2.20
N$27
  Top 0.254: U$1.P8.7 39.37,60.07 39.37,56.9 U$2.21
N$28
  Top 0.254: U$1.P8.5 36.83,60.07 36.83,56.9 U$2.22
N$29
  Top 0.254: U$2.23 34.29,56.9 34.29,60.07 U$1.P8.3
N$30
  Top 0.254: R8.1 21.59,51.82 21.84,51.56 JP2.1
N$31
  Bottom 0.254: U$1.P8.46 87.63,62.61 87.63,59.44 U$3.2
N$32
  Bottom 0.254: U$1.P8.44 85.09,62.61 85.09,59.44 U$3.3
N$33
  Bottom 0.254: U$1.P8.42 82.55,62.61 82.55,59.44 U$3.4
N$34
  Bottom 0.254: U$1.P8.40 80.01,62.61 80.01,59.44 U$3.5
N$35
  Bottom 0.254: U$1.P8.38 77.47,62.61 77.47,59.44 U$3.6
N$36
  Bottom 0.254: U$1.P8.36 74.93,62.61 74.93,59.44 U$3.7
N$37
  Bottom 0.254: U$1.P8.34 72.39,62.61 72.39,59.44 U$3.8
N$38
  Bottom 0.254: U$1.P8.32 69.85,62.61 69.85,59.44 U$3.9
N$39
  Bottom 0.254: U$1.P8.30 67.31,62.61 67.31,59.44 U$3.10
N$40
  Bottom 0.254: U$1.P8.28 64.77,62.61 64.77,59.44 U$3.11
N$41
  Bottom 0.254: U$1.P8.26 62.23,62.61 62.23,59.44 U$3.12
N$42
  Bottom 0.254: U$1.P8.24 59.69,62.61 59.69,59.44 U$3.13
N$43
  Bottom 0.254: U$1.P8.22 57.15,62.61 57.15,59.44 U$3.14
N$44
  Bottom 0.254: U$1.P8.20 54.61,62.61 54.61,59.44 U$3.15
N$45
  Bottom 0.254: U$1.P8.18 52.07,62.61 52.07,59.44 U$3.16
N$46
  Bottom 0.254: U$1.P8.16 49.53,62.61 49.53,59.44 U$3.17
N$47
  Bottom 0.254: U$1.P8.14 46.99,62.61 46.99,59.44 U$3.18
N$48
  Bottom 0.254: U$1.P8.12 44.45,62.61 44.45,59.44 U$3.19
N$49
  Bottom 0.254: U$1.P8.10 41.91,62.61 41.91,59.44 U$3.20
N$50
  Bottom 0.254: U$1.P8.8 39.37,62.61 39.37,59.44 U$3.21
N$51
  Bottom 0.254: U$1.P8.6 36.83,62.61 36.83,59.44 U$3.22
N$52
  Bottom 0.254: U$1.P8.4 34.29,62.61 34.29,59.44 U$3.23
N$53
  Top 0.254: U2.3 107.31,24.51 107.95,25.15 107.95,27.22 R9.1
N$54
  Top 0.254: R12.2 116.64,22.99 SJ2.3
N$55
  Top 0.254: R13.2 116.59,24.77 116.71,24.64 SJ2.1
N$56
  Top 0.254: U$1.P9.42 82.55,16.89 82.55,20.07 U$5.4
N$57
  Top 0.254: U$1.P9.40 80.01,16.89 80.01,20.07 U$5.5
N$58
  Top 0.254: U$1.P9.38 77.47,16.89 77.47,20.07 U$5.6
N$59
  Top 0.254: U$1.P9.36 74.93,16.89 74.93,20.07 U$5.7
N$60
  Top 0.254: U$1.P9.34 72.39,16.89 72.39,20.07 U$5.8
N$61
  Top 0.254: U$1.P9.32 69.85,16.89 69.85,20.07 U$5.9
N$62
  Top 0.254: U$1.P9.30 67.31,16.89 67.31,20.07 U$5.10
N$63
  Top 0.254: U$1.P9.28 64.77,16.89 64.77,20.07 U$5.11
N$64
  Top 0.254: U$1.P9.26 62.23,16.89 62.23,20.07 U$5.12
N$65
  Top 0.254: U$1.P9.24 59.69,16.89 59.69,20.07 U$5.13
N$66
  Top 0.254: U$1.P9.22 57.15,16.89 57.15,20.07 U$5.14
N$67
  Top 0.254: U$7.P8.45 177.8,60.07 177.8,56.9 U$8.2
N$68
  Top 0.254: U$1.P9.18 52.07,16.89 52.07,19.56 50.8,20.83 U$5.16
N$69
  Top 0.254: U$1.P9.16 49.53,16.89 49.53,20.07 U$5.17
N$70
  Top 0.254: U$1.P9.14 46.99,16.89 46.99,20.07 U$5.18
N$71
  Top 0.254: U$1.P9.12 44.45,16.89 44.45,20.07 U$5.19
N$72
  Top 0.254: U$1.P9.10 41.91,16.89 41.91,20.07 U$5.20
N$73
  Top 0.254: U$1.P9.8 39.37,16.89 39.37,20.07 U$5.21
N$74
  Top 0.254: U$7.P8.43 175.26,60.07 175.26,56.9 U$8.3
N$75
  Top 0.254: U$7.P8.41 172.72,60.07 172.72,56.9 U$8.4
N$76
  Top 0.254: U$7.P8.39 170.18,60.07 170.18,56.9 U$8.5
N$77
  Top 0.254: U$7.P8.37 167.64,60.07 167.64,56.9 U$8.6
N$78
  Top 0.254: U$7.P8.35 165.1,60.07 165.1,56.9 U$8.7
N$79
  Bottom 0.254: U$1.P9.41 82.55,14.35 82.55,17.53 U$4.4
N$80
  Bottom 0.254: U$1.P9.39 80.01,14.35 80.01,17.53 U$4.5
N$81
  Bottom 0.254: U$1.P9.37 77.47,14.35 77.47,17.53 U$4.6
N$82
  Bottom 0.254: U$1.P9.35 74.93,14.35 74.93,17.53 U$4.7
N$83
  Bottom 0.254: U$1.P9.33 72.39,14.35 72.39,17.53 U$4.8
N$84
  Bottom 0.254: U$1.P9.31 69.85,14.35 69.85,17.53 U$4.9
N$85
  Bottom 0.254: U$1.P9.29 67.31,14.35 67.31,17.53 U$4.10
N$86
  Bottom 0.254: U$1.P9.27 64.77,14.35 64.77,17.53 U$4.11
N$87
  Bottom 0.254: U$1.P9.25 62.23,14.35 62.23,17.53 U$4.12
N$88
  Bottom 0.254: U$1.P9.23 59.69,14.35 59.69,17.53 U$4.13
N$89
  Bottom 0.254: U$1.P9.21 57.15,14.35 57.15,17.53 U$4.14
N$90
  Top 0.254: U$7.P8.33 162.56,60.07 162.56,56.9 U$8.8
N$91
  Bottom 0.254: U$1.P9.17 52.07,14.35 52.07,17.53 U$4.16
N$92
  Bottom 0.254: U$1.P9.15 49.53,14.35 49.53,17.53 U$4.17
N$93
  Bottom 0.254: U$1.P9.13 46.99,14.35 46.99,17.53 U$4.18
N$94
  Bottom 0.254: U$1.P9.11 44.45,14.35 44.45,17.53 U$4.19
N$95
  Bottom 0.254: U$1.P9.9 41.91,14.35 41.91,17.53 U$4.20
N$96
  Bottom 0.254: U$1.P9.7 39.37,14.35 39.37,17.53 U$4.21
N$97
  Top 0.254: U$7.P8.31 160.02,60.07 160.02,56.9 U$8.9
N$98
  Top 0.254: U$7.P8.29 157.48,60.07 157.48,56.9 U$8.10
N$99
  Top 0.254: U$7.P8.27 154.94,60.07 154.94,56.9 U$8.11
N$100  (via drill 1.02 pad 1.78)
  other vias: 86.36,24.51
N$101  (via drill 1.02 pad 1.78)
  other vias: 86.36,27.05
N$102  (via drill 1.02 pad 1.78)
  other vias: 86.36,29.59
N$103  (via drill 1.02 pad 1.78)
  other vias: 86.36,32.13
N$104  (via drill 1.02 pad 1.78)
  other vias: 86.36,34.67
N$105  (via drill 1.02 pad 1.78)
  other vias: 86.36,37.21
N$106  (via drill 1.02 pad 1.78)
  other vias: 86.36,39.75
N$107  (via drill 1.02 pad 1.78)
  other vias: 86.36,42.29
N$108  (via drill 1.02 pad 1.78)
  other vias: 86.36,44.83
N$109  (via drill 1.02 pad 1.78)
  other vias: 86.36,47.37
N$110  (via drill 1.02 pad 1.78)
  other vias: 86.36,49.91
N$111  (via drill 1.02 pad 1.78)
  other vias: 86.36,52.45
N$112  (via drill 1.02 pad 1.78)
  other vias: 83.82,24.51
N$113  (via drill 1.02 pad 1.78)
  other vias: 83.82,27.05
N$114  (via drill 1.02 pad 1.78)
  other vias: 83.82,29.59
N$115  (via drill 1.02 pad 1.78)
  other vias: 83.82,32.13
N$116  (via drill 1.02 pad 1.78)
  other vias: 83.82,34.67
N$117  (via drill 1.02 pad 1.78)
  other vias: 83.82,37.21
N$118  (via drill 1.02 pad 1.78)
  other vias: 83.82,39.75
N$119  (via drill 1.02 pad 1.78)
  other vias: 83.82,42.29
N$120  (via drill 1.02 pad 1.78)
  other vias: 83.82,44.83
N$121  (via drill 1.02 pad 1.78)
  other vias: 83.82,47.37
N$122  (via drill 1.02 pad 1.78)
  other vias: 83.82,49.91
N$123  (via drill 1.02 pad 1.78)
  other vias: 83.82,52.45
N$124  (via drill 1.02 pad 1.78)
  other vias: 81.28,24.51
N$125  (via drill 1.02 pad 1.78)
  other vias: 81.28,27.05
N$126  (via drill 1.02 pad 1.78)
  other vias: 81.28,29.59
N$127  (via drill 1.02 pad 1.78)
  other vias: 81.28,32.13
N$128  (via drill 1.02 pad 1.78)
  other vias: 81.28,34.67
N$129  (via drill 1.02 pad 1.78)
  other vias: 81.28,37.21
N$130  (via drill 1.02 pad 1.78)
  other vias: 81.28,39.75
N$131  (via drill 1.02 pad 1.78)
  other vias: 81.28,42.29
N$132  (via drill 1.02 pad 1.78)
  other vias: 81.28,44.83
N$133  (via drill 1.02 pad 1.78)
  other vias: 81.28,47.37
N$134  (via drill 1.02 pad 1.78)
  other vias: 81.28,49.91
N$135  (via drill 1.02 pad 1.78)
  other vias: 81.28,52.45
N$136  (via drill 1.02 pad 1.78)
  other vias: 78.74,24.51
N$137  (via drill 1.02 pad 1.78)
  other vias: 78.74,27.05
N$138  (via drill 1.02 pad 1.78)
  other vias: 78.74,29.59
N$139  (via drill 1.02 pad 1.78)
  other vias: 78.74,32.13
N$140  (via drill 1.02 pad 1.78)
  other vias: 78.74,34.67
N$141  (via drill 1.02 pad 1.78)
  other vias: 78.74,37.21
N$142  (via drill 1.02 pad 1.78)
  other vias: 78.74,39.75
N$143  (via drill 1.02 pad 1.78)
  other vias: 78.74,42.29
N$144  (via drill 1.02 pad 1.78)
  other vias: 78.74,44.83
N$145  (via drill 1.02 pad 1.78)
  other vias: 78.74,47.37
N$146  (via drill 1.02 pad 1.78)
  other vias: 78.74,49.91
N$147  (via drill 1.02 pad 1.78)
  other vias: 78.74,52.45
N$148  (via drill 1.02 pad 1.78)
  other vias: 76.2,24.51
N$149  (via drill 1.02 pad 1.78)
  other vias: 76.2,27.05
N$150  (via drill 1.02 pad 1.78)
  other vias: 76.2,29.59
N$151  (via drill 1.02 pad 1.78)
  other vias: 76.2,32.13
N$152  (via drill 1.02 pad 1.78)
  other vias: 76.2,34.67
N$153  (via drill 1.02 pad 1.78)
  other vias: 76.2,37.21
N$154  (via drill 1.02 pad 1.78)
  other vias: 76.2,39.75
N$155  (via drill 1.02 pad 1.78)
  other vias: 76.2,42.29
N$156  (via drill 1.02 pad 1.78)
  other vias: 76.2,44.83
N$157  (via drill 1.02 pad 1.78)
  other vias: 76.2,47.37
N$158  (via drill 1.02 pad 1.78)
  other vias: 76.2,49.91
N$159  (via drill 1.02 pad 1.78)
  other vias: 76.2,52.45
N$160  (via drill 1.02 pad 1.78)
  other vias: 73.66,24.51
N$161  (via drill 1.02 pad 1.78)
  other vias: 73.66,27.05
N$162  (via drill 1.02 pad 1.78)
  other vias: 73.66,29.59
N$163  (via drill 1.02 pad 1.78)
  other vias: 73.66,32.13
N$164  (via drill 1.02 pad 1.78)
  other vias: 73.66,34.67
N$165  (via drill 1.02 pad 1.78)
  other vias: 73.66,37.21
N$166  (via drill 1.02 pad 1.78)
  other vias: 73.66,39.75
N$167  (via drill 1.02 pad 1.78)
  other vias: 73.66,42.29
N$168  (via drill 1.02 pad 1.78)
  other vias: 73.66,44.83
N$169  (via drill 1.02 pad 1.78)
  other vias: 73.66,47.37
N$170  (via drill 1.02 pad 1.78)
  other vias: 73.66,49.91
N$171  (via drill 1.02 pad 1.78)
  other vias: 73.66,52.45
N$172  (via drill 1.02 pad 1.78)
  other vias: 71.12,24.51
N$173  (via drill 1.02 pad 1.78)
  other vias: 71.12,27.05
N$174  (via drill 1.02 pad 1.78)
  other vias: 71.12,29.59
N$175  (via drill 1.02 pad 1.78)
  other vias: 71.12,32.13
N$176  (via drill 1.02 pad 1.78)
  other vias: 71.12,34.67
N$177  (via drill 1.02 pad 1.78)
  other vias: 71.12,37.21
N$178  (via drill 1.02 pad 1.78)
  other vias: 71.12,39.75
N$179  (via drill 1.02 pad 1.78)
  other vias: 71.12,42.29
N$180  (via drill 1.02 pad 1.78)
  other vias: 71.12,44.83
N$181  (via drill 1.02 pad 1.78)
  other vias: 71.12,47.37
N$182  (via drill 1.02 pad 1.78)
  other vias: 71.12,49.91
N$183  (via drill 1.02 pad 1.78)
  other vias: 71.12,52.45
N$184  (via drill 1.02 pad 1.78)
  other vias: 68.58,24.51
N$185  (via drill 1.02 pad 1.78)
  other vias: 68.58,27.05
N$186  (via drill 1.02 pad 1.78)
  other vias: 68.58,29.59
N$187  (via drill 1.02 pad 1.78)
  other vias: 68.58,32.13
N$188  (via drill 1.02 pad 1.78)
  other vias: 68.58,34.67
N$189  (via drill 1.02 pad 1.78)
  other vias: 68.58,37.21
N$190  (via drill 1.02 pad 1.78)
  other vias: 68.58,39.75
N$191  (via drill 1.02 pad 1.78)
  other vias: 68.58,42.29
N$192  (via drill 1.02 pad 1.78)
  other vias: 68.58,44.83
N$193  (via drill 1.02 pad 1.78)
  other vias: 68.58,47.37
N$194  (via drill 1.02 pad 1.78)
  other vias: 68.58,49.91
N$195  (via drill 1.02 pad 1.78)
  other vias: 68.58,52.45
N$196  (via drill 1.02 pad 1.78)
  other vias: 66.04,24.51
N$197  (via drill 1.02 pad 1.78)
  other vias: 66.04,27.05
N$198  (via drill 1.02 pad 1.78)
  other vias: 66.04,29.59
N$199  (via drill 1.02 pad 1.78)
  other vias: 66.04,32.13
N$200  (via drill 1.02 pad 1.78)
  other vias: 66.04,34.67
N$201  (via drill 1.02 pad 1.78)
  other vias: 66.04,37.21
N$202  (via drill 1.02 pad 1.78)
  other vias: 66.04,39.75
N$203  (via drill 1.02 pad 1.78)
  other vias: 66.04,42.29
N$204  (via drill 1.02 pad 1.78)
  other vias: 66.04,44.83
N$205  (via drill 1.02 pad 1.78)
  other vias: 66.04,47.37
N$206  (via drill 1.02 pad 1.78)
  other vias: 66.04,49.91
N$207  (via drill 1.02 pad 1.78)
  other vias: 66.04,52.45
N$208  (via drill 1.02 pad 1.78)
  other vias: 63.5,24.51
N$209  (via drill 1.02 pad 1.78)
  other vias: 63.5,27.05
N$210  (via drill 1.02 pad 1.78)
  other vias: 63.5,29.59
N$211  (via drill 1.02 pad 1.78)
  other vias: 63.5,32.13
N$212  (via drill 1.02 pad 1.78)
  other vias: 63.5,34.67
N$213  (via drill 1.02 pad 1.78)
  other vias: 63.5,37.21
N$214  (via drill 1.02 pad 1.78)
  other vias: 63.5,39.75
N$215  (via drill 1.02 pad 1.78)
  other vias: 63.5,42.29
N$216  (via drill 1.02 pad 1.78)
  other vias: 63.5,44.83
N$217  (via drill 1.02 pad 1.78)
  other vias: 63.5,47.37
N$218  (via drill 1.02 pad 1.78)
  other vias: 63.5,49.91
N$219  (via drill 1.02 pad 1.78)
  other vias: 63.5,52.45
N$220  (via drill 1.02 pad 1.78)
  other vias: 60.96,24.51
N$221  (via drill 1.02 pad 1.78)
  other vias: 60.96,27.05
N$222  (via drill 1.02 pad 1.78)
  other vias: 60.96,29.59
N$223  (via drill 1.02 pad 1.78)
  other vias: 60.96,32.13
N$224  (via drill 1.02 pad 1.78)
  other vias: 60.96,34.67
N$225  (via drill 1.02 pad 1.78)
  other vias: 60.96,37.21
N$226  (via drill 1.02 pad 1.78)
  other vias: 60.96,39.75
N$227  (via drill 1.02 pad 1.78)
  other vias: 60.96,42.29
N$228  (via drill 1.02 pad 1.78)
  other vias: 60.96,44.83
N$229  (via drill 1.02 pad 1.78)
  other vias: 60.96,47.37
N$230  (via drill 1.02 pad 1.78)
  other vias: 60.96,49.91
N$231  (via drill 1.02 pad 1.78)
  other vias: 60.96,52.45
N$232  (via drill 1.02 pad 1.78)
  other vias: 58.42,24.51
N$233  (via drill 1.02 pad 1.78)
  other vias: 58.42,27.05
N$234  (via drill 1.02 pad 1.78)
  other vias: 58.42,29.59
N$235  (via drill 1.02 pad 1.78)
  other vias: 58.42,32.13
N$236  (via drill 1.02 pad 1.78)
  other vias: 58.42,34.67
N$237  (via drill 1.02 pad 1.78)
  other vias: 58.42,37.21
N$238  (via drill 1.02 pad 1.78)
  other vias: 58.42,39.75
N$239  (via drill 1.02 pad 1.78)
  other vias: 58.42,42.29
N$240  (via drill 1.02 pad 1.78)
  other vias: 58.42,44.83
N$241  (via drill 1.02 pad 1.78)
  other vias: 58.42,47.37
N$242  (via drill 1.02 pad 1.78)
  other vias: 58.42,49.91
N$243  (via drill 1.02 pad 1.78)
  other vias: 58.42,52.45
N$244  (via drill 1.02 pad 1.78)
  other vias: 55.88,24.51
N$245  (via drill 1.02 pad 1.78)
  other vias: 55.88,27.05
N$246  (via drill 1.02 pad 1.78)
  other vias: 55.88,29.59
N$247  (via drill 1.02 pad 1.78)
  other vias: 55.88,32.13
N$248  (via drill 1.02 pad 1.78)
  other vias: 55.88,34.67
N$249  (via drill 1.02 pad 1.78)
  other vias: 55.88,37.21
N$250  (via drill 1.02 pad 1.78)
  other vias: 55.88,39.75
N$251  (via drill 1.02 pad 1.78)
  other vias: 55.88,42.29
N$252  (via drill 1.02 pad 1.78)
  other vias: 55.88,44.83
N$253  (via drill 1.02 pad 1.78)
  other vias: 55.88,47.37
N$254  (via drill 1.02 pad 1.78)
  other vias: 55.88,49.91
N$255  (via drill 1.02 pad 1.78)
  other vias: 55.88,52.45
N$256  (via drill 1.02 pad 1.78)
  other vias: 53.34,24.51
N$257  (via drill 1.02 pad 1.78)
  other vias: 53.34,27.05
N$258  (via drill 1.02 pad 1.78)
  other vias: 53.34,29.59
N$259  (via drill 1.02 pad 1.78)
  other vias: 53.34,32.13
N$260  (via drill 1.02 pad 1.78)
  other vias: 53.34,34.67
N$261  (via drill 1.02 pad 1.78)
  other vias: 53.34,37.21
N$262  (via drill 1.02 pad 1.78)
  other vias: 53.34,39.75
N$263  (via drill 1.02 pad 1.78)
  other vias: 53.34,42.29
N$264  (via drill 1.02 pad 1.78)
  other vias: 53.34,44.83
N$265  (via drill 1.02 pad 1.78)
  other vias: 53.34,47.37
N$266  (via drill 1.02 pad 1.78)
  other vias: 53.34,49.91
N$267  (via drill 1.02 pad 1.78)
  other vias: 53.34,52.45
N$268  (via drill 1.02 pad 1.78)
  other vias: 50.8,24.51
N$269  (via drill 1.02 pad 1.78)
  other vias: 50.8,27.05
N$270  (via drill 1.02 pad 1.78)
  other vias: 50.8,29.59
N$271  (via drill 1.02 pad 1.78)
  other vias: 50.8,32.13
N$272  (via drill 1.02 pad 1.78)
  other vias: 50.8,34.67
N$273  (via drill 1.02 pad 1.78)
  other vias: 50.8,37.21
N$274  (via drill 1.02 pad 1.78)
  other vias: 50.8,39.75
N$275  (via drill 1.02 pad 1.78)
  other vias: 50.8,42.29
N$276  (via drill 1.02 pad 1.78)
  other vias: 50.8,44.83
N$277  (via drill 1.02 pad 1.78)
  other vias: 50.8,47.37
N$278  (via drill 1.02 pad 1.78)
  other vias: 50.8,49.91
N$279  (via drill 1.02 pad 1.78)
  other vias: 50.8,52.45
N$280  (via drill 1.02 pad 1.78)
  other vias: 48.26,24.51
N$281  (via drill 1.02 pad 1.78)
  other vias: 48.26,27.05
N$282  (via drill 1.02 pad 1.78)
  other vias: 48.26,29.59
N$283  (via drill 1.02 pad 1.78)
  other vias: 48.26,32.13
N$284  (via drill 1.02 pad 1.78)
  other vias: 48.26,34.67
N$285  (via drill 1.02 pad 1.78)
  other vias: 48.26,37.21
N$286  (via drill 1.02 pad 1.78)
  other vias: 48.26,39.75
N$287  (via drill 1.02 pad 1.78)
  other vias: 48.26,42.29
N$288  (via drill 1.02 pad 1.78)
  other vias: 48.26,44.83
N$289  (via drill 1.02 pad 1.78)
  other vias: 48.26,47.37
N$290  (via drill 1.02 pad 1.78)
  other vias: 48.26,49.91
N$291  (via drill 1.02 pad 1.78)
  other vias: 48.26,52.45
N$292  (via drill 1.02 pad 1.78)
  other vias: 45.72,24.51
N$293  (via drill 1.02 pad 1.78)
  other vias: 45.72,27.05
N$294  (via drill 1.02 pad 1.78)
  other vias: 45.72,29.59
N$295  (via drill 1.02 pad 1.78)
  other vias: 45.72,32.13
N$296  (via drill 1.02 pad 1.78)
  other vias: 45.72,34.67
N$297  (via drill 1.02 pad 1.78)
  other vias: 45.72,37.21
N$298  (via drill 1.02 pad 1.78)
  other vias: 45.72,39.75
N$299  (via drill 1.02 pad 1.78)
  other vias: 45.72,42.29
N$300  (via drill 1.02 pad 1.78)
  other vias: 45.72,44.83
N$301  (via drill 1.02 pad 1.78)
  other vias: 45.72,47.37
N$302  (via drill 1.02 pad 1.78)
  other vias: 45.72,49.91
N$303  (via drill 1.02 pad 1.78)
  other vias: 45.72,52.45
N$304  (via drill 1.02 pad 1.78)
  other vias: 43.18,24.51
N$305  (via drill 1.02 pad 1.78)
  other vias: 43.18,27.05
N$306  (via drill 1.02 pad 1.78)
  other vias: 43.18,29.59
N$307  (via drill 1.02 pad 1.78)
  other vias: 43.18,32.13
N$308  (via drill 1.02 pad 1.78)
  other vias: 43.18,34.67
N$309  (via drill 1.02 pad 1.78)
  other vias: 43.18,37.21
N$310  (via drill 1.02 pad 1.78)
  other vias: 43.18,39.75
N$311  (via drill 1.02 pad 1.78)
  other vias: 43.18,42.29
N$312  (via drill 1.02 pad 1.78)
  other vias: 43.18,44.83
N$313  (via drill 1.02 pad 1.78)
  other vias: 43.18,47.37
N$314  (via drill 1.02 pad 1.78)
  other vias: 43.18,49.91
N$315  (via drill 1.02 pad 1.78)
  other vias: 43.18,52.45
N$316  (via drill 1.02 pad 1.78)
  other vias: 40.64,24.51
N$317  (via drill 1.02 pad 1.78)
  other vias: 40.64,27.05
N$318  (via drill 1.02 pad 1.78)
  other vias: 40.64,29.59
N$319  (via drill 1.02 pad 1.78)
  other vias: 40.64,32.13
N$320  (via drill 1.02 pad 1.78)
  other vias: 40.64,34.67
N$321  (via drill 1.02 pad 1.78)
  other vias: 40.64,37.21
N$322  (via drill 1.02 pad 1.78)
  other vias: 40.64,39.75
N$323  (via drill 1.02 pad 1.78)
  other vias: 40.64,42.29
N$324  (via drill 1.02 pad 1.78)
  other vias: 40.64,44.83
N$325  (via drill 1.02 pad 1.78)
  other vias: 40.64,47.37
N$326  (via drill 1.02 pad 1.78)
  other vias: 40.64,49.91
N$327  (via drill 1.02 pad 1.78)
  other vias: 40.64,52.45
N$328  (via drill 1.02 pad 1.78)
  other vias: 38.1,24.51
N$329  (via drill 1.02 pad 1.78)
  other vias: 38.1,27.05
N$330  (via drill 1.02 pad 1.78)
  other vias: 38.1,29.59
N$331  (via drill 1.02 pad 1.78)
  other vias: 38.1,32.13
N$332  (via drill 1.02 pad 1.78)
  other vias: 38.1,34.67
N$333  (via drill 1.02 pad 1.78)
  other vias: 38.1,37.21
N$334  (via drill 1.02 pad 1.78)
  other vias: 38.1,39.75
N$335  (via drill 1.02 pad 1.78)
  other vias: 38.1,42.29
N$336  (via drill 1.02 pad 1.78)
  other vias: 38.1,44.83
N$337  (via drill 1.02 pad 1.78)
  other vias: 38.1,47.37
N$338  (via drill 1.02 pad 1.78)
  other vias: 38.1,49.91
N$339  (via drill 1.02 pad 1.78)
  other vias: 38.1,52.45
N$340
  Top 0.254: U$7.P8.25 152.4,60.07 152.4,56.9 U$8.12
N$341
  Top 0.254: U$7.P8.23 149.86,60.07 149.86,56.9 U$8.13
N$342
  Top 0.254: U$7.P8.21 147.32,60.07 147.32,56.9 U$8.14
N$343
  Top 0.254: U$7.P8.19 144.78,60.07 144.78,56.9 U$8.15
N$344
  Top 0.254: U$7.P8.17 142.24,60.07 142.24,56.9 U$8.16
N$345
  Top 0.254: U$7.P8.15 139.7,60.07 139.7,56.9 U$8.17
N$346
  Top 0.254: U$7.P8.13 137.16,60.07 137.16,56.9 U$8.18
N$347
  Top 0.254: U$7.P8.11 134.62,60.07 134.62,56.9 U$8.19
N$348
  Top 0.254: U$7.P8.9 132.08,60.07 132.08,56.9 U$8.20
N$349
  Top 0.254: U$7.P8.7 129.54,60.07 129.54,56.9 U$8.21
N$350
  Top 0.254: U$7.P8.5 127,60.07 127,56.9 U$8.22
N$351
  Top 0.254: U$8.23 124.46,56.9 124.46,60.07 U$7.P8.3
N$352
  Bottom 0.254: U$7.P8.46 177.8,62.61 177.8,59.44 U$9.2
N$353
  Bottom 0.254: U$7.P8.44 175.26,62.61 175.26,59.44 U$9.3
N$354
  Bottom 0.254: U$7.P8.42 172.72,62.61 172.72,59.44 U$9.4
N$355
  Bottom 0.254: U$7.P8.40 170.18,62.61 170.18,59.44 U$9.5
N$356
  Bottom 0.254: U$7.P8.38 167.64,62.61 167.64,59.44 U$9.6
N$357
  Bottom 0.254: U$7.P8.36 165.1,62.61 165.1,59.44 U$9.7
N$358
  Bottom 0.254: U$7.P8.34 162.56,62.61 162.56,59.44 U$9.8
N$359
  Bottom 0.254: U$7.P8.32 160.02,62.61 160.02,59.44 U$9.9
N$360
  Bottom 0.254: U$7.P8.30 157.48,62.61 157.48,59.44 U$9.10
N$361
  Bottom 0.254: U$7.P8.28 154.94,62.61 154.94,59.44 U$9.11
N$362
  Bottom 0.254: U$7.P8.26 152.4,62.61 152.4,59.44 U$9.12
N$363
  Bottom 0.254: U$7.P8.24 149.86,62.61 149.86,59.44 U$9.13
N$364  (via drill 1.02 pad 1.78)
  other vias: 88.9,52.45
N$365  (via drill 1.02 pad 1.78)
  other vias: 88.9,49.91
N$366  (via drill 1.02 pad 1.78)
  other vias: 88.9,47.37
N$367  (via drill 1.02 pad 1.78)
  other vias: 91.44,49.91
N$368  (via drill 1.02 pad 1.78)
  other vias: 91.44,47.37
N$369  (via drill 1.02 pad 1.78)
  other vias: 88.9,44.83
N$370  (via drill 1.02 pad 1.78)
  other vias: 91.44,44.83
N$371  (via drill 1.02 pad 1.78)
  other vias: 91.44,42.29
N$372  (via drill 1.02 pad 1.78)
  other vias: 88.9,42.29
N$373  (via drill 1.02 pad 1.78)
  other vias: 88.9,39.75
N$374  (via drill 1.02 pad 1.78)
  other vias: 91.44,39.75
N$375  (via drill 1.02 pad 1.78)
  other vias: 91.44,37.21
N$376  (via drill 1.02 pad 1.78)
  other vias: 88.9,37.21
N$377  (via drill 1.02 pad 1.78)
  other vias: 88.9,34.67
N$378  (via drill 1.02 pad 1.78)
  other vias: 88.9,32.13
N$379  (via drill 1.02 pad 1.78)
  other vias: 88.9,29.59
N$380  (via drill 1.02 pad 1.78)
  other vias: 88.9,27.05
N$381  (via drill 1.02 pad 1.78)
  other vias: 91.44,27.05
N$382  (via drill 1.02 pad 1.78)
  other vias: 91.44,29.59
N$383  (via drill 1.02 pad 1.78)
  other vias: 91.44,34.67
N$384  (via drill 1.02 pad 1.78)
  other vias: 91.44,32.13
N$385  (via drill 1.02 pad 1.78)
  other vias: 88.9,24.51
N$386  (via drill 1.02 pad 1.78)
  other vias: 91.44,24.51
N$387
  Bottom 0.254: U$7.P8.22 147.32,62.61 147.32,59.44 U$9.14
N$388
  Bottom 0.254: U$7.P8.20 144.78,62.61 144.78,59.44 U$9.15
N$389
  Bottom 0.254: U$7.P8.18 142.24,62.61 142.24,59.44 U$9.16
N$390
  Bottom 0.254: U$7.P8.16 139.7,62.61 139.7,59.44 U$9.17
N$391  (via drill 1.02 pad 1.78)
  other vias: 91.44,52.45
N$392
  Bottom 0.254: U$7.P8.14 137.16,62.61 137.16,59.44 U$9.18
N$393
  Bottom 0.254: U$7.P8.12 134.62,62.61 134.62,59.44 U$9.19
N$394
  Bottom 0.254: U$7.P8.10 132.08,62.61 132.08,59.44 U$9.20
N$395
  Bottom 0.254: U$7.P8.8 129.54,62.61 129.54,59.44 U$9.21
N$396
  Bottom 0.254: U$7.P8.6 127,62.61 127,59.44 U$9.22
N$397
  Bottom 0.254: U$7.P8.4 124.46,62.61 124.46,59.44 U$9.23
N$398
  Top 0.254: U$7.P9.42 172.72,16.89 172.72,20.07 U$11.4
N$399
  Top 0.254: U$7.P9.40 170.18,16.89 170.18,20.07 U$11.5
N$400
  Top 0.254: U$7.P9.38 167.64,16.89 167.64,20.07 U$11.6
N$401
  Top 0.254: U$7.P9.36 165.1,16.89 165.1,20.07 U$11.7
N$402
  Top 0.254: U$7.P9.34 162.56,16.89 162.56,20.07 U$11.8
N$403
  Top 0.254: U$7.P9.32 160.02,16.89 160.02,20.07 U$11.9
N$404
  Top 0.254: U$7.P9.30 157.48,16.89 157.48,20.07 U$11.10
N$405